# Altium PCB Allproject.PcbDoc
Units mm, origin at the board's own origin, x right, y up, seen from the top; angles counter-clockwise.
Board outline 142 x 100 mm, 2 copper layers (Top Layer, Bottom Layer); 29 components, 41 nets, 140 pads, 66 vias.
Unrouted connection lines stored in the file: 1.
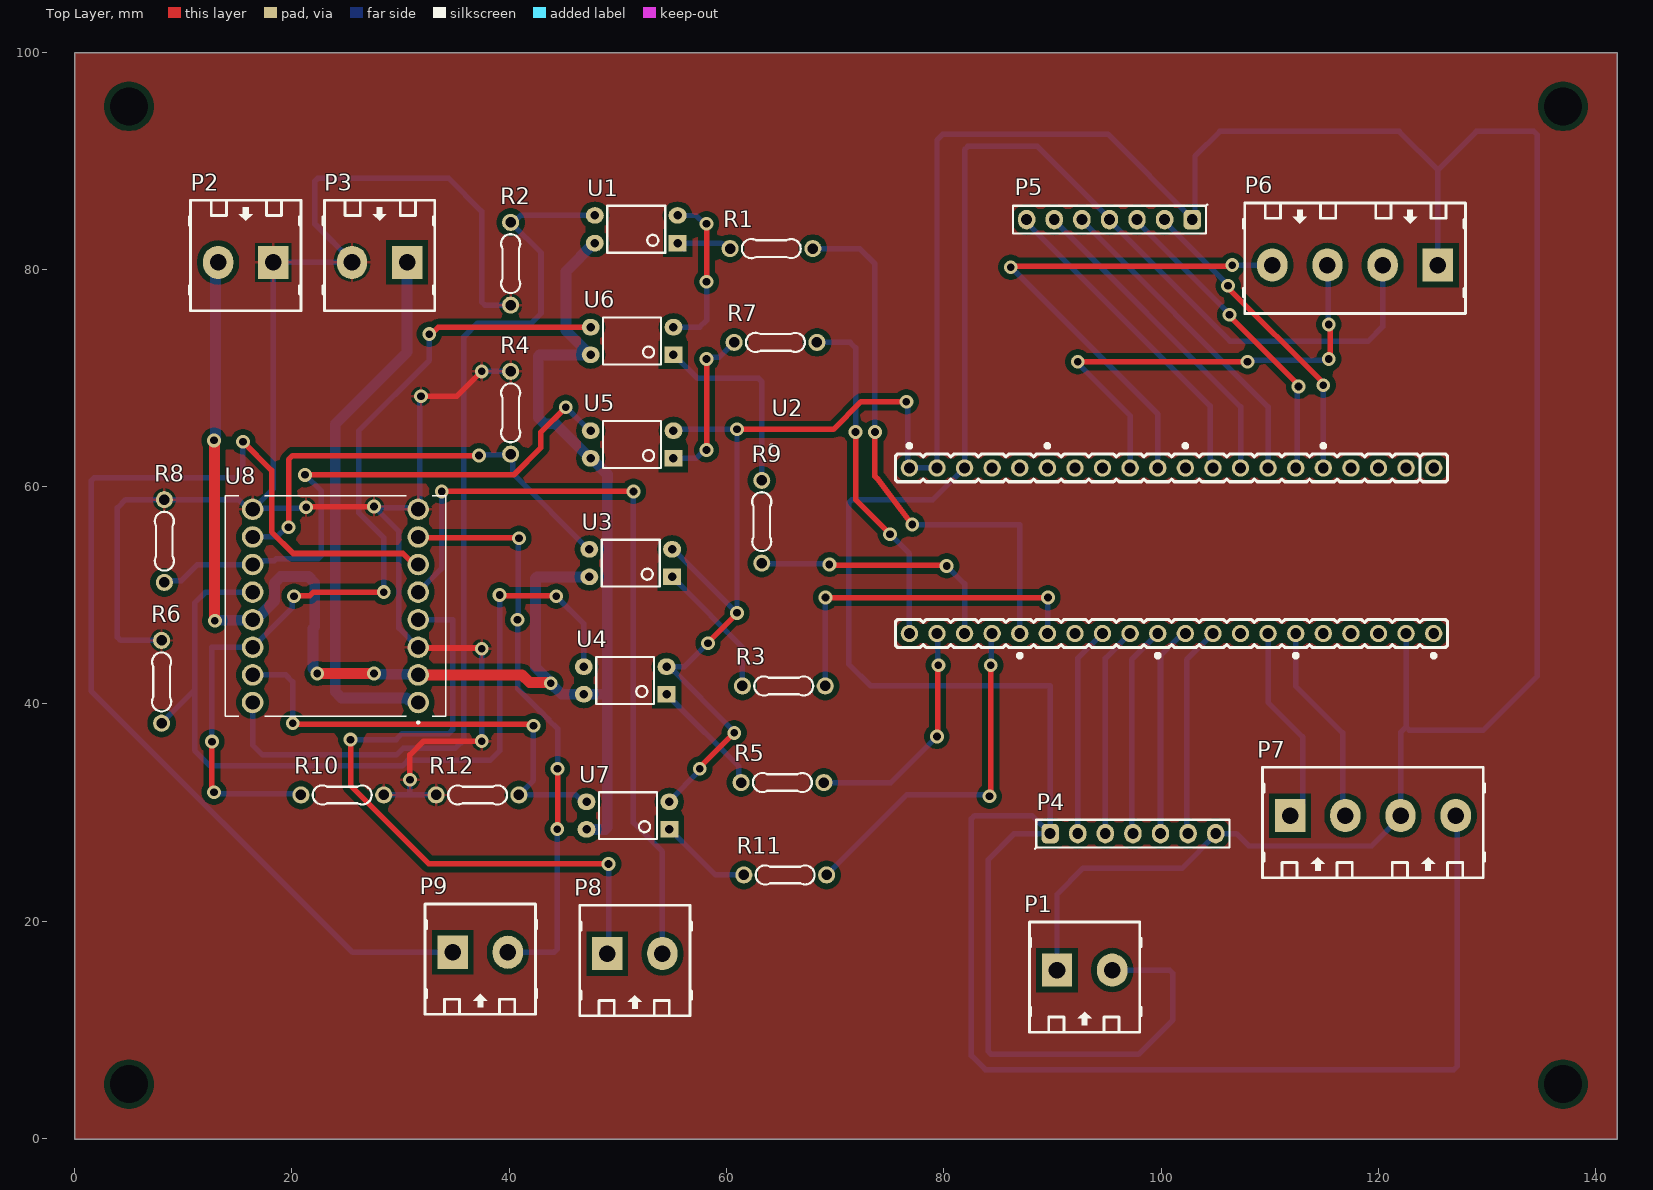
[diagram p0: Top Layer view]
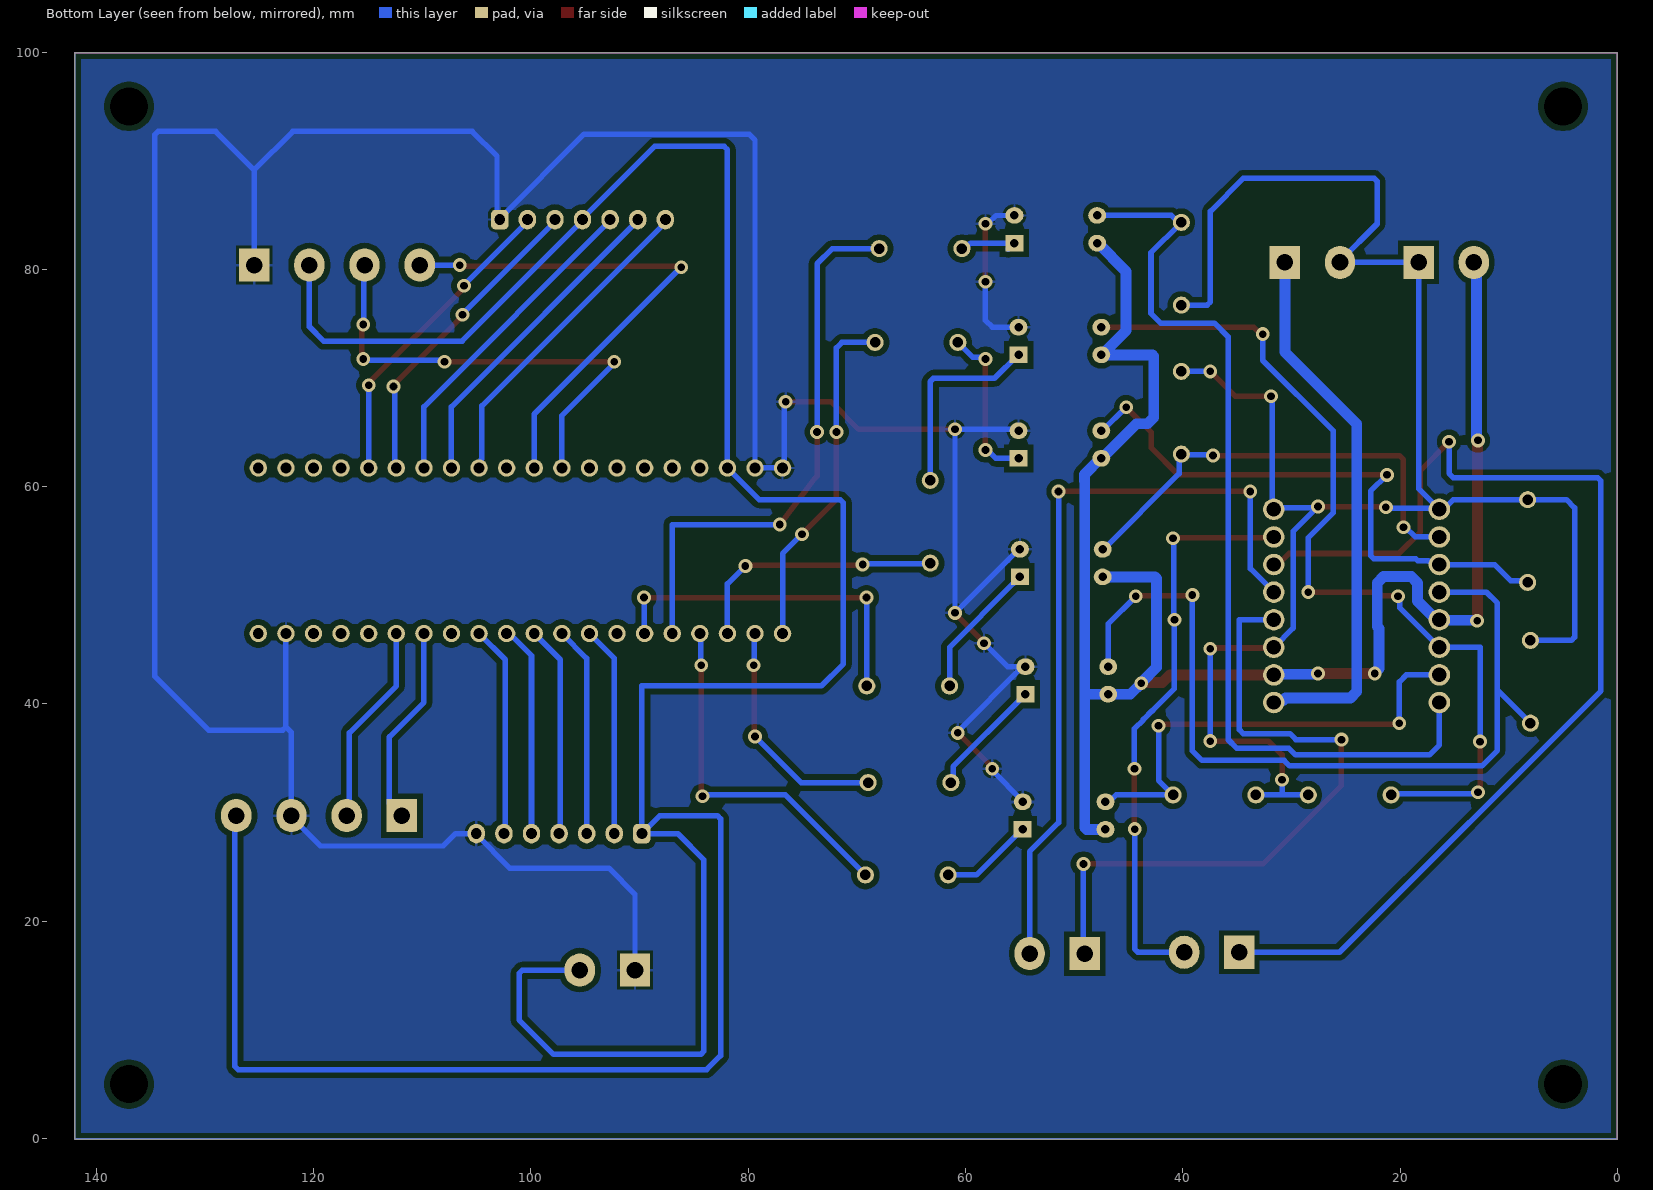
[diagram p1: Bottom Layer view, seen from below]

## Layer stack, top to bottom
Top Solder: solder mask 0.0102, Solder Resist, Dk 3.5
Top Layer: signal copper 0.0356
Dielectric 1: dielectric 0.32, FR-4, Dk 4.8
Bottom Layer: signal copper 0.0356
Bottom Solder: solder mask 0.0102, Solder Resist, Dk 3.5

## Board outline
0,-0.051 142,-0.051 142,99.949 0,99.949

## Design rules (kind name [scope] priority, off if disabled: settings)
Clearance [All] p1: gap=0.508 ignorepadtopadclearanceinfootprint=FALSE
PolygonConnect [All] p1: connectstyle=Relief reliefconductorwidth=0.254 reliefentries=4 polygonreliefangle="90 Angle" airgapwidth=0.254
RoutingVias [All] p1: holewidth=0.711 width=1.27 viastyle="Through Hole" minholewidth=0.711 minwidth=1.27 maxholewidth=0.711 maxwidth=1.27
SolderMaskExpansion [All] p1: expansion=0.102 istentingtop=FALSE
SupplyNets "Schematic Supply Nets_2" [InNet('3.3V DK')] p1: voltage=0.000
SupplyNets "Schematic Supply Nets_1" [InNet('5V DL')] p2: voltage=0.000
SupplyNets "Schematic Supply Nets" [InNet('GND DK')] p3: voltage=0.000
Width "GND DK" [InNet('GND DK')] p1: maxlimit=1.6 minlimit=0.5 preferedwidth=1.2
Width "GND DL" [InNet('GND DL')] p2: maxlimit=1.6 minlimit=0.5 preferedwidth=1.2
Width "5V DL" [InNet('5V DL')] p3: maxlimit=1.6 minlimit=0.5 preferedwidth=1.2
Width "12V DL" [InNet('12V DL')] p4: maxlimit=2 minlimit=0.5 preferedwidth=1.5
Width [All] p5: maxlimit=2.54 minlimit=0.508 preferedwidth=1.016
30 further rules are at their usual default settings.

## Components (designator, comment, footprint, x,y, rotation, side; value= is the part's Value field where it differs from the comment)
P1 "Header 2" HDR/Terminal/2 92.964,15.494 r0 top
P2 "Header 2" HDR/Terminal/2 15.748,80.645 r180 top
P3 "Header 2" HDR/Terminal/2 28.067,80.645 r180 top
P4 "Header 7" HDR/Header/7 97.409,28.067 r0 top
P5 "Header 7" HDR/Header/7 95.25,84.582 r180 top
P6 "Header 4" HDR/Terminal/4 117.856,80.391 r180 top
P7 "Header 4" HDR/Terminal/4 119.507,29.718 r0 top
P8 "Header 2" HDR/Terminal/2 51.562,17.018 r0 top
P9 "Header 2" HDR/Terminal/2 37.338,17.145 r0 top
R1 "220R" "R 1/4W/300" 67.945,81.915 r180 top
R2 "4.7k" "R 1/4W/300" 40.132,76.708 r90 top
R3 "220R" "R 1/4W/300" 69.088,41.656 r180 top
R4 "4.7k" "R 1/4W/300" 40.132,70.612 r270 top
R5 "220R" "R 1/4W/300" 68.961,32.766 r180 top
R6 "4.7k" "R 1/4W/300" 8.001,45.847 r270 top
R7 "220R" "R 1/4W/300" 68.326,73.279 r180 top
R8 "4.7k" "R 1/4W/300" 8.255,58.801 r270 top
R9 "220R" "R 1/4W/300" 63.246,52.959 r90 top
R10 "4.7k" "R 1/4W/300" 28.448,31.623 r180 top
R11 "220R" "R 1/4W/300" 69.215,24.257 r180 top
R12 "4.7k" "R 1/4W/300" 33.274,31.623 r0 top
U1 "PC817" "DIP4 - PC817" 51.689,83.693 r180 top
U2 "STM32F103C8T6 BLUEPILL" "Female header 20x20 pin" 100.965,54.102 r180 top value="Connector 9"
U3 "PC817" "DIP4 - PC817" 51.181,52.959 r180 top
U4 "PC817" "DIP4 - PC817" 50.673,42.164 r180 top
U5 "PC817" "DIP4 - PC817" 51.308,63.881 r180 top
U6 "PC817" "DIP4 - PC817" 51.308,73.406 r180 top
U7 "PC817" "DIP4 - PC817" 50.927,29.718 r180 top
U8 "ROB-14450" MODULE_ROB-14450 24.003,49.022 r180 top

## Footprints (in the part's own frame and the unit in brackets; to place one, negate y for a bottom-side part, rotate by r counter-clockwise, add the part's x,y. Pads: shape width x height; smd on the part's side, far side on the other; paste and mask are expansions set on the pad)
"DIP4 - PC817" [mil]
  rect 65x60 hole 31: 1(-150,50)
  oval 65x60 hole 31: 2(-150,-50) 3(150,-50) 4(150,50)
  silkscreen extent -105,-85 105,85, body extent -155,-90 155,90, height 169
"Female header 20x20 pin" [mm] "Connector DIP Male, 9Pin_2.54mm"
  round 1.6 hole 1 mask+0.1: 1(-24.13,-7.62) 2(-21.59,-7.62) 3(-19.05,-7.62) 4(-16.51,-7.62) 5(-13.97,-7.62) 6(-11.43,-7.62) 7(-8.89,-7.62) 8(-6.35,-7.62) 9(-3.81,-7.62) 10(-1.27,-7.62) 11(1.27,-7.62) 12(3.81,-7.62) 13(6.35,-7.62) 14(8.89,-7.62) 15(11.43,-7.62) 16(13.97,-7.62) 17(16.51,-7.62) 18(19.05,-7.62) 19(21.59,-7.62) 20(24.13,-7.62) 21(24.13,7.62) 22(21.59,7.62) 23(19.05,7.62) 24(16.51,7.62) 25(13.97,7.62) 26(11.43,7.62) 27(8.89,7.62) 28(6.35,7.62) 29(3.81,7.62) 30(1.27,7.62) 31(-1.27,7.62) 32(-3.81,7.62) 33(-6.35,7.62) 34(-8.89,7.62) 35(-11.43,7.62) 36(-13.97,7.62) 37(-16.51,7.62) 38(-19.05,7.62) 39(-21.59,7.62) 40(-24.13,7.62)
  silkscreen extent -25.4,-9.75 36.93,9.75, body extent -30.73,-11.63 27.07,11.37, height 20.1
HDR/Header/7 [mm]
  rrect50% 1.6x1.8 hole 1: 1(-7.62,0)
  oval 1.6x1.8 hole 1: 2(-5.08,0) 3(-2.54,0) 4(0,0) 5(2.54,0) 6(5.08,0) 7(7.62,0)
  silkscreen extent -9.02,-1.4 8.89,1.27, body extent -8.89,-1.27 8.89,1.27, height 8.89
HDR/Terminal/2 [mil] "Header 2, 2 pin, hight 400mil, Pin to Pin 200mil, Colour Green"
  rect 110x120 hole 60: 1(-100,0)
  oval 110x120 hole 60: 2(100,0)
  silkscreen extent -200,-225 205,175, body extent -229,-218 200,168, height 559
HDR/Terminal/4 [mil]
  rect 110x120 hole 60: 1(-300,0)
  oval 110x120 hole 60: 2(-100,0) 3(100,0) 4(300,0)
  silkscreen extent -400,-225 405,175, body extent -429,-218 400,168, height 559
MODULE_ROB-14450 [mm]
  round 1.98 hole 1.32: 1(-7.62,8.89) 2(-7.62,6.35) 3(-7.62,3.81) 4(-7.62,1.27) 5(-7.62,-1.27) 6(-7.62,-3.81) 7(-7.62,-6.35) 8(-7.62,-8.89) 9(7.62,-8.89) 10(7.62,-6.35) 11(7.62,-3.81) 12(7.62,-1.27) 13(7.62,1.27) 14(7.62,3.81) 15(7.62,6.35) 16(7.62,8.89)
  silkscreen extent -10.16,-10.16 10.16,10.83, body extent -10.16,-10.16 10.16,10.16, height 5.5
"R 1/4W/300" [mil] "Through hole resitor, axial 300mils, 1/4W"
  round 62 hole 38: 1(0,0) 2(300,0)
  silkscreen extent 44,-35 257,35, body extent -12,-47 312,47, height 97

## Part data
P1 P2 P3 P8 P9: "Header, 2-Pin"
P4 P5: "Header, 7-Pin"
P6 P7: "Header, 4-Pin"
R1 R2 R3 R4 R5 R6 R7 R8 R9 R10 R11 R12: library part Resistor, "Resistor"
U1 U3 U4 U5 U6 U7: "Opto PC817B"
U2: library part "STM32F103C8T6 KIT BLUE PILL", "Connector 9"
U8: "TB6612FNG Motor Controller/Driver Power Management Evaluation Board", PACKAGE=None, Availability="In Stock", Check_prices=https://www.snapeda.com/parts/ROB-14450/SparkFun%20Electronics/view-part/2656367/?ref=eda, MF="SparkFun Electronics", MP=ROB-14450, Price=None, SnapEDA_Link=https://www.snapeda.com/parts/ROB-14450/SparkFun%20Electronics/view-part/2656367/?ref=snap

## Free pads (board coordinates)
  round 0 / inner rrect10% 1.6x0.3 / far side round 0 hole 3.5 unplated mask+0.07: 3(5,5) 3(5,95) 3(137,5) 3(137,95)

## Via types
v1: diameter 1.27, hole 0.711, Top Layer to Bottom Layer, 66 vias

## Nets (pads, with @x,y where several pads share a name; then routed paths per layer and width w, separated by ;. In a path a pad name is that pad's centre, name@x,y a point inside that pad or via, vN(x,y) a via of type N, cw(c..) or ccw(c..) an arc to the next point about the centre after c; other vN are vias at no path point)
"3.3V DK": P1.2 P4.1 P5.4 P6.2 P7.4 U2.18 | length 292.5
  Bottom Layer w0.508: P1.2 100.794,15.494 101.092,15.196 101.092,10.922 97.917,7.747 84.372,7.747 84.074,8.045 84.074,25.654 86.487,28.067 P4.1 ; P6.2 120.396,74.72 119.082,73.406 106.326,73.406 95.25,84.482 P5.4 95.25,84.682 88.619,91.313 82.213,91.313 81.915,91.015 U2.18 78.994,58.801 71.545,58.801 71.247,58.503 71.247,43.688 73.279,41.656 89.789,41.656 P4.1 ; P7.4 127.254,29.591 127.254,6.648 126.956,6.35 83.82,6.35 82.55,7.62 82.55,29.42 82.848,29.718 88.138,29.718 89.233,28.623 89.254,28.623 89.789,28.088 P4.1
"5V DL": P2.2 U1.4 U3.4 U4.4 U5.4 U6.4 U7.4 U8.2 U8.13 | length 162.2
  Top Layer w0.508: v1(12.827,64.262) v1@12.867,64.222 ; v1@12.867,47.697 v1(12.906,47.658)
  Top Layer w1: v1@12.867,47.697 v1@12.867,64.222 ; v1(22.321,42.799) v1(27.559,42.799) ; U8.2 41.18,42.672 41.89,41.962 43.763,41.962 v1(43.815,41.91)
  Bottom Layer w0.508: v1(12.827,64.262) v1@12.973,64.408 ; v1(12.906,47.658) v1@12.953,47.705 ; P2.2@12.973,80.41 P2.2 ; v1(27.559,42.799) v1@27.622,42.735 ; U8.2@31.559,42.735 U8.2 ; 42.672,72.009 42.799,72.136 ; U5.4@47.434,62.611 U5.4 U5.4@47.561,62.611 ; U6.4@47.434,72.136 U6.4 ; U1.4@47.816,82.423 U1.4 ; 48.837,28.448 49.022,28.633 ; 49.022,59.565 cw(c50.038,59.565) 49.022,59.569 cw(c51.435,59.563) 49.023,59.622
  Bottom Layer w1: v1@12.953,47.705 U8.13@16.336,47.705 ; v1@12.973,64.408 P2.2@12.973,80.41 ; U8.13 16.648,47.752 17.19,48.294 17.211,48.294 18.381,49.464 18.381,51.147 18.967,51.733 21.512,51.733 22.098,51.147 22.098,47.117 21.94,46.959 21.94,43.253 22.321,42.872 v1(22.321,42.799) ; v1@27.622,42.735 U8.2@31.559,42.735 ; 42.672,72.009 42.672,66.372 43.258,65.786 44.259,65.786 U5.4@47.434,62.611 ; 42.799,72.136 U6.4 ; U7.4 48.837,28.448 ; U3.4 42.545,51.689 42.418,51.562 42.418,43.38 43.815,41.983 v1(43.815,41.91) 44.831,40.894 U4.4 48.724,40.894 ; U6.4@47.434,72.136 45.212,74.358 45.212,79.819 U1.4@47.816,82.423 ; U5.4@47.561,62.611 49.06,61.113 49.023,59.623 ; 49.022,28.633 49.022,59.565
"12V DL": P3.1 U8.1 | length 50.3
  Bottom Layer w1: P3.1 30.607,72.39 23.987,65.77 23.987,41.138 24.573,40.552 30.547,40.552 30.78,40.32 31.435,40.32 U8.1
AIN1: R10.2 U6.3 U8.14 | length 82.5
  Top Layer w0.508: v1(12.636,36.53) 12.636,32.068 v1(12.827,31.877) ; v1(20.193,49.919) 20.248,49.974 21.653,49.974 21.971,50.292 v1(28.448,50.292) ; v1(32.639,74.041) 32.845,74.041 33.48,74.676 U6.3
  Bottom Layer w0.508: v1(12.636,36.53) 12.636,45.212 U8.14 20.047,48.876 20.047,49.773 v1(20.193,49.919) ; v1(12.827,31.877) 12.954,31.75 20.701,31.75 R10.2 ; v1(28.448,50.292) 28.448,55.301 26.162,57.587 26.162,65.151 32.639,71.628 v1(32.639,74.041)
AIN2: R12.2 U7.3 U8.15 | length 43.4
  Top Layer w0.508: v1(20.066,38.227) 20.181,38.112 42.118,38.112 v1(42.233,37.996)
  Bottom Layer w0.508: U8.15 19.431,42.672 20.066,42.037 v1(20.066,38.227) ; v1(42.233,37.996) 42.233,32.962 R12.2 46.144,31.623 46.779,30.988 U7.3
AN1: P5.2 U2.5 | length 28.9
  Top Layer w0.508: v1(106.172,78.486) 106.172,78.296 114.935,69.533 v1(114.935,69.342)
  Bottom Layer w0.508: P5.2 100.33,84.405 106.172,78.563 v1(106.172,78.486) ; U2.5 v1(114.935,69.342)
AN2: P5.3 U2.6 | length 29.1
  Top Layer w0.508: v1(106.299,75.819) 106.299,75.692 112.649,69.342 v1(112.649,69.215)
  Bottom Layer w0.508: P5.3 97.79,84.405 106.299,75.896 v1(106.299,75.819) ; U2.6 112.522,61.849 112.522,69.088 v1(112.649,69.215)
AN3: P5.5 U2.7 | length 30
  Bottom Layer w0.508: P5.5 92.71,84.482 109.855,67.337 U2.7
AN4: P5.6 U2.8 | length 30
  Bottom Layer w0.508: P5.6 90.17,84.482 107.315,67.337 U2.8
AN5: P5.7 U2.9 | length 30
  Bottom Layer w0.508: P5.7 87.63,84.328 104.521,67.437 104.521,62.566 104.566,62.521 104.566,61.931 U2.9
"AOUT 1": P8.1 U8.4 | length 62.4
  Top Layer w0.508: v1(25.4,36.715) 25.4,32.48 32.607,25.273 v1(49.149,25.273)
  Bottom Layer w0.508: v1(25.4,36.715) 29.585,36.715 30.147,37.276 34.439,37.276 34.798,37.636 34.798,47.752 U8.4 ; P8.1 49.149,17.018 v1(49.149,25.273)
"AOUT 2": P8.2 U8.5 | length 71.5
  Top Layer w0.508: v1(33.782,59.563) v1(51.435,59.563)
  Bottom Layer w0.508: U8.5 33.782,52.451 v1(33.782,59.563) ; v1(51.435,59.563) 51.435,29.085 54.102,26.418 P8.2
BIN1: R6.2 U4.3 U8.12 | length 80
  Top Layer w0.508: v1(39.116,50.038) 39.179,49.974 44.259,49.974 v1(44.323,49.911)
  Bottom Layer w0.508: R6.2 11.049,41.275 ; U8.12 12.065,50.292 11.049,49.276 11.049,41.275 ; v1(39.116,50.038) 39.116,35.687 38.227,34.798 30.663,34.798 30.167,34.302 12.474,34.302 11.049,35.727 11.049,41.275 ; v1(44.323,49.911) 46.863,47.371 U4.3
BIN2: R8.2 U5.3 U8.11 | length 54.1
  Top Layer w0.508: v1(21.209,61.087) 40.418,61.087 42.92,63.589 42.92,65.018 v1(45.212,67.31)
  Bottom Layer w0.508: R8.2 8.407,51.333 9.804,51.333 11.303,52.832 U8.11 16.665,53.114 17.34,53.114 17.417,53.19 18.392,53.19 18.563,53.361 22.405,53.361 22.702,53.658 22.702,59.594 v1(21.209,61.087) ; v1(45.212,67.31) 45.244,67.31 47.403,65.151 U5.3
"BOUT 1": P9.2 U8.7 | length 53.4
  Top Layer w0.508: U8.7 31.686,55.308 40.831,55.308 v1(40.894,55.245) ; v1(44.427,28.477) 44.45,28.499 v1(44.45,34.036)
  Bottom Layer w0.508: P9.2 44.13,17.145 44.427,17.443 v1(44.427,28.477) ; v1(40.894,55.245) 40.831,55.181 40.831,47.816 v1(40.767,47.752) 40.767,41.402 42.776,39.393 42.812,39.393 43.63,38.575 43.63,38.539 44.45,37.719 v1(44.45,34.036)
"BOUT 2": P9.1 U8.6 | length 103.9
  Top Layer w0.508: v1(15.494,64.135) 18.135,61.494 18.135,55.835 20.122,53.848 30.209,53.848 31.225,52.832 U8.6
  Bottom Layer w0.508: v1(15.494,64.135) 15.494,61.214 15.113,60.833 1.822,60.833 1.524,60.535 1.524,41.204 25.583,17.145 P9.1
"ENCA 1": P6.4 U2.11 | length 48.2
  Top Layer w0.508: v1(86.167,80.205) 86.26,80.298 106.46,80.298 v1(106.553,80.391)
  Bottom Layer w0.508: v1(86.167,80.205) 99.695,66.677 U2.11 ; v1(106.553,80.391) P6.4
"ENCA 2": P6.3 U2.12 | length 43.8
  Top Layer w0.508: v1(92.329,71.501) v1(107.95,71.501) ; v1(115.443,71.755) 115.573,71.885 115.573,74.8 v1(115.443,74.93)
  Bottom Layer w0.508: v1(92.329,71.501) 92.329,71.374 97.155,66.548 U2.12 ; v1(107.95,71.501) 108.077,71.628 115.316,71.628 v1(115.443,71.755) ; P6.3 115.379,80.328 115.379,74.993 v1(115.443,74.93)
"ENCB 1": P7.1 U2.34 | length 18.6
  Bottom Layer w0.508: U2.34 109.855,40.132 113.03,36.957 113.03,30.861 P7.1
"ENCB 2": P7.2 U2.35 | length 18.7
  Bottom Layer w0.508: U2.35 112.395,41.656 116.713,37.338 116.713,29.972 P7.2
"GND DK": P1.1 P4.7 P5.1 P6.1 P7.3 U1.2 U2.19 U2.20 U2.39 U3.2 U4.2 U5.2 U6.2 U7.2 | length 329.3
  Top Layer w0.5: v1(57.531,34.036) 57.531,34.163 v1(60.706,37.338) ; v1(58.166,78.867) v1(58.166,84.201) ; v1(58.293,45.593) 58.293,45.65 60.968,48.325 v1(60.968,48.382) ; v1(60.96,65.278) 69.85,65.278 72.392,67.82 v1(76.556,67.82)
  Bottom Layer w0.5: U4.2 U4.2@54.737,43.434 ; U7.2 54.737,31.083 57.531,33.877 v1(57.531,34.036) ; U3.2 55.121,54.229 56.268,53.082 v1(60.968,48.382) 60.964,48.386 60.964,65.274 v1(60.96,65.278) 55.245,65.278 U5.2 ; U6.2 57.531,74.676 58.166,75.311 v1(58.166,78.867) ; U1.2 57.196,84.963 57.958,84.201 v1(58.166,84.201) ; v1(58.293,45.593) 56.134,43.434 U4.2@54.737,43.434 ; v1(60.706,37.338) 60.706,37.465 U4.2@54.737,43.434 ; v1(76.556,67.82) 76.695,67.681 76.695,61.862 U2.20 U2.19 79.375,91.909 79.922,92.456 95.096,92.456 102.87,84.682 P5.1 103.124,84.836 103.124,90.424 105.41,92.71 121.92,92.71 125.476,89.154 ; P1.1 90.424,22.479 92.837,24.892 101.954,24.892 105.029,27.967 P4.7 106.934,28.067 108.077,26.924 119.38,26.924 122.047,29.591 P7.3 122.047,37.377 122.555,37.885 ; U2.39@122.257,46.482 U2.39 122.555,37.885 ; P6.1 125.476,89.154 ; 122.555,37.885 122.848,37.592 129.667,37.592 134.62,42.545 134.62,92.417 134.327,92.71 129.032,92.71 125.476,89.154
"GND DL": P2.1 P3.2 R2.1 R4.1 R6.1 R8.1 R10.1 R12.1 U8.3 U8.8 U8.9 | length 176.4
  Top Layer w0.508: v1(21.305,58.1) 21.338,58.133 27.526,58.133 v1(27.559,58.166) ; v1(30.861,33.02) 30.861,35.306 32.131,36.576 v1(37.465,36.576) ; U8.3 31.686,45.148 37.401,45.148 v1(37.465,45.085) ; v1(31.877,68.326) 35.179,68.326 v1(37.465,70.612)
  Bottom Layer w0.508: R6.1 4.235,45.847 3.937,46.145 3.937,58.039 4.699,58.801 R8.1 15.096,58.801 15.985,57.912 U8.9 U8.9@16.571,58.1 ; v1(21.305,58.1) 21.211,58.006 16.664,58.006 U8.9@16.571,58.1 ; R10.1 30.861,31.623 ; v1(30.861,33.02) 30.861,31.623 ; U8.3 29.845,46.99 29.845,55.88 v1(27.559,58.166) 27.686,58.039 31.496,58.039 U8.8 31.75,58.039 31.75,68.199 v1(31.877,68.326) ; R12.1 30.861,31.623 ; v1(37.465,36.576) v1(37.465,45.085) ; v1(37.465,70.612) R4.1 ; R2.1 37.763,76.708 37.465,77.006 37.465,85.344 34.417,88.392 22.396,88.392 22.098,88.094 22.098,84.201 25.527,80.772 P3.2 P2.1 18.288,59.817 U8.9@16.571,58.1
NetR1_2: R1.2 U1.1 | length 5.9
  Bottom Layer w0.508: U1.1@56.07,81.852 56.07,81.915 55.562,82.423 U1.1 59.528,82.423 60.036,81.915 R1.2
NetR3_2: R3.2 U3.1 | length 12.8
  Bottom Layer w0.508: U3.1 55.054,51.689 55.562,51.181 55.562,51.117 61.468,45.212 R3.2
NetR5_2: R5.2 U4.1 | length 11
  Bottom Layer w0.508: U4.1 54.546,40.894 55.054,40.386 55.054,40.322 61.137,34.24 61.137,32.97 R5.2
NetR7_2: R7.2 U5.1 | length 14.9
  Top Layer w0.508: v1(58.166,63.373) v1(58.166,71.755)
  Bottom Layer w0.508: U5.1 57.198,62.611 57.96,63.373 v1(58.166,63.373) ; v1(58.166,71.755) 58.312,71.901 59.328,71.901 R7.2
NetR9_2: R9.2 U6.1 | length 18.2
  Bottom Layer w0.508: U6.1 55.181,72.136 57.34,69.977 62.948,69.977 63.246,69.679 R9.2
NetR11_2: R11.2 U7.1 | length 8.6
  Bottom Layer w0.508: U7.1 54.8,28.448 58.991,24.257 R11.2
PA8: R1.1 U2.25 | length 51.4
  Top Layer w0.508: v1(73.66,65.024) 73.66,60.96 73.914,60.706 v1(77.089,56.515)
  Bottom Layer w0.508: R1.1 72.263,81.915 73.66,80.518 v1(73.66,65.024) ; v1(77.089,56.515) 86.995,56.515 U2.25
PA9: R3.1 U2.26 | length 32
  Top Layer w0.508: v1(69.111,49.788) v1(89.592,49.788)
  Bottom Layer w0.508: R3.1 69.088,49.765 v1(69.111,49.788) ; U2.26 89.563,46.51 89.563,49.76 v1(89.592,49.788)
PB12: R7.1 U2.21 | length 32.1
  Top Layer w0.508: v1(71.882,65.024) 71.882,58.801 v1(75.057,55.626)
  Bottom Layer w0.508: R7.1 71.374,73.279 71.882,72.771 v1(71.882,65.024) ; v1(75.057,55.626) 76.835,53.848 U2.21
PB13: R5.1 U2.22 | length 21.8
  Top Layer w0.508: v1(79.367,36.999) 79.434,37.067 79.434,43.493 v1(79.502,43.561)
  Bottom Layer w0.508: R5.1 75.134,32.766 v1(79.367,36.999) ; U2.22 79.438,46.419 79.438,43.624 v1(79.502,43.561)
PB14: R9.1 U2.23 | length 24
  Top Layer w0.508: v1(69.469,52.832) 69.532,52.768 80.2,52.768 v1(80.264,52.705)
  Bottom Layer w0.508: R9.1 63.309,52.895 69.406,52.895 v1(69.469,52.832) ; v1(80.264,52.705) 81.915,51.054 U2.23
PB15: R11.1 U2.24 | length 33.2
  Top Layer w0.508: v1(84.201,31.496) 84.328,31.623 v1(84.328,43.561)
  Bottom Layer w0.508: R11.1 76.581,31.623 84.074,31.623 v1(84.201,31.496) ; v1(84.328,43.561) 84.391,43.624 84.391,46.419 U2.24
"PWM A": R2.2 U1.3 U8.16 | length 86.9
  Bottom Layer w0.508: U8.16 16.383,36.239 17.304,35.318 29.625,35.318 30.248,35.941 35.052,35.941 35.814,36.703 35.814,73.787 37.084,75.057 42.037,75.057 42.926,75.946 42.926,81.534 40.276,84.184 R2.2 40.421,84.328 41.056,84.963 U1.3
"PWM B": R4.2 U3.3 U8.10 | length 42.3
  Top Layer w0.508: v1(19.685,56.261) 19.685,62.484 20.066,62.865 v1(37.211,62.865)
  Bottom Layer w0.508: U8.10 18.598,55.372 19.487,56.261 v1(19.685,56.261) ; v1(37.211,62.865) 37.274,62.928 40.069,62.928 R4.2 40.336,62.788 40.336,61.2 47.307,54.229 U3.3
"TCS OUT": P4.4 U2.30 | length 19.5
  Bottom Layer w0.508: P4.4 97.282,28.194 97.282,44.069 U2.30
"TCS S0": P4.2 U2.28 | length 19.4
  Bottom Layer w0.508: P4.2 92.329,44.196 U2.28
"TCS S1": P4.3 U2.29 | length 19.4
  Bottom Layer w0.508: P4.3 94.869,44.196 U2.29
"TCS S2": P4.5 U2.31 | length 19.5
  Bottom Layer w0.508: P4.5 99.949,44.45 101.981,46.482 U2.31
"TCS S3": P4.6 U2.32 | length 19.5
  Bottom Layer w0.508: P4.6 102.362,28.194 102.362,44.069 U2.32
pads on no net: U2.1 U2.2 U2.3 U2.4 U2.10 U2.13 U2.14 U2.15 U2.16 U2.17 U2.27 U2.33 U2.36 U2.37 U2.38 U2.40
copper on no net: | length 242
  Bottom Layer w0.15: 0,-0.051 142,-0.051 142,99.949

## Polygon pours and split planes (outlines as drawn)
"GND DK" on Bottom Layer "GND_DK_L02_P000" (solid, remove dead copper, pour order 0): 0,99.949 142,99.949 142,-0.051 0,-0.051
"GND DL" on Top Layer "GND_DL_L01_P002" (solid, remove dead copper, pour order 2): 0,99.949 141.986,99.949 141.986,0 0,0

## Keep-outs
Bottom Layer:
  lines w0.15: 0,-0.051 0,99.949 142,99.949

## Text inside footprints (layer, text, board x,y; h text height)
U2: Mechanical 2 "20" at 77.343,62.103 h1.2 r180; Mechanical 2 "1" at 125.235,62.122 h1.2 r180; Mechanical 2 "21" at 77.343,46.863 h1.2 r180; Mechanical 2 "40" at 125.603,46.863 h1.2 r180